# Altium PCB ExBoard.PcbDoc
Units mil, origin at the board's own origin, x right, y up, seen from the top; angles counter-clockwise.
Board outline 4548.82 x 3140.79 mil, 2 copper layers (Top Layer, Bottom Layer); 28 components, 43 nets, 168 pads, 0 vias.
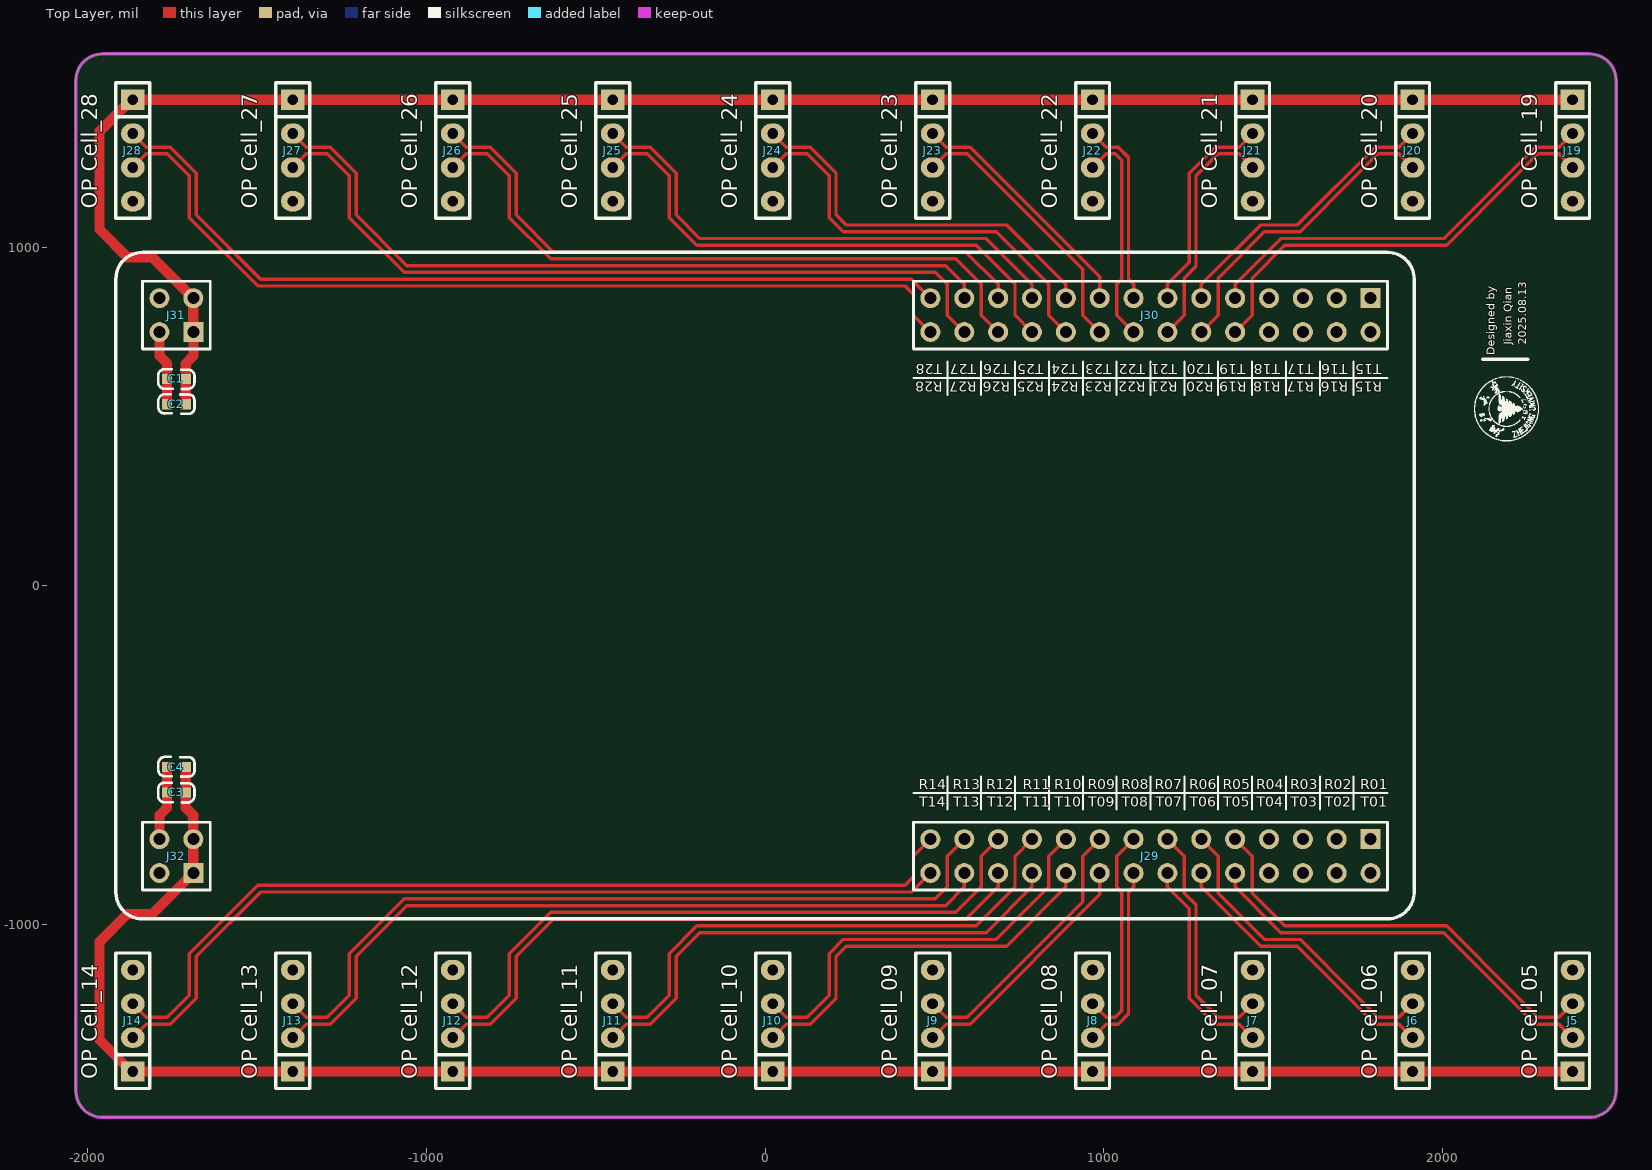
[diagram p0: Top Layer view]
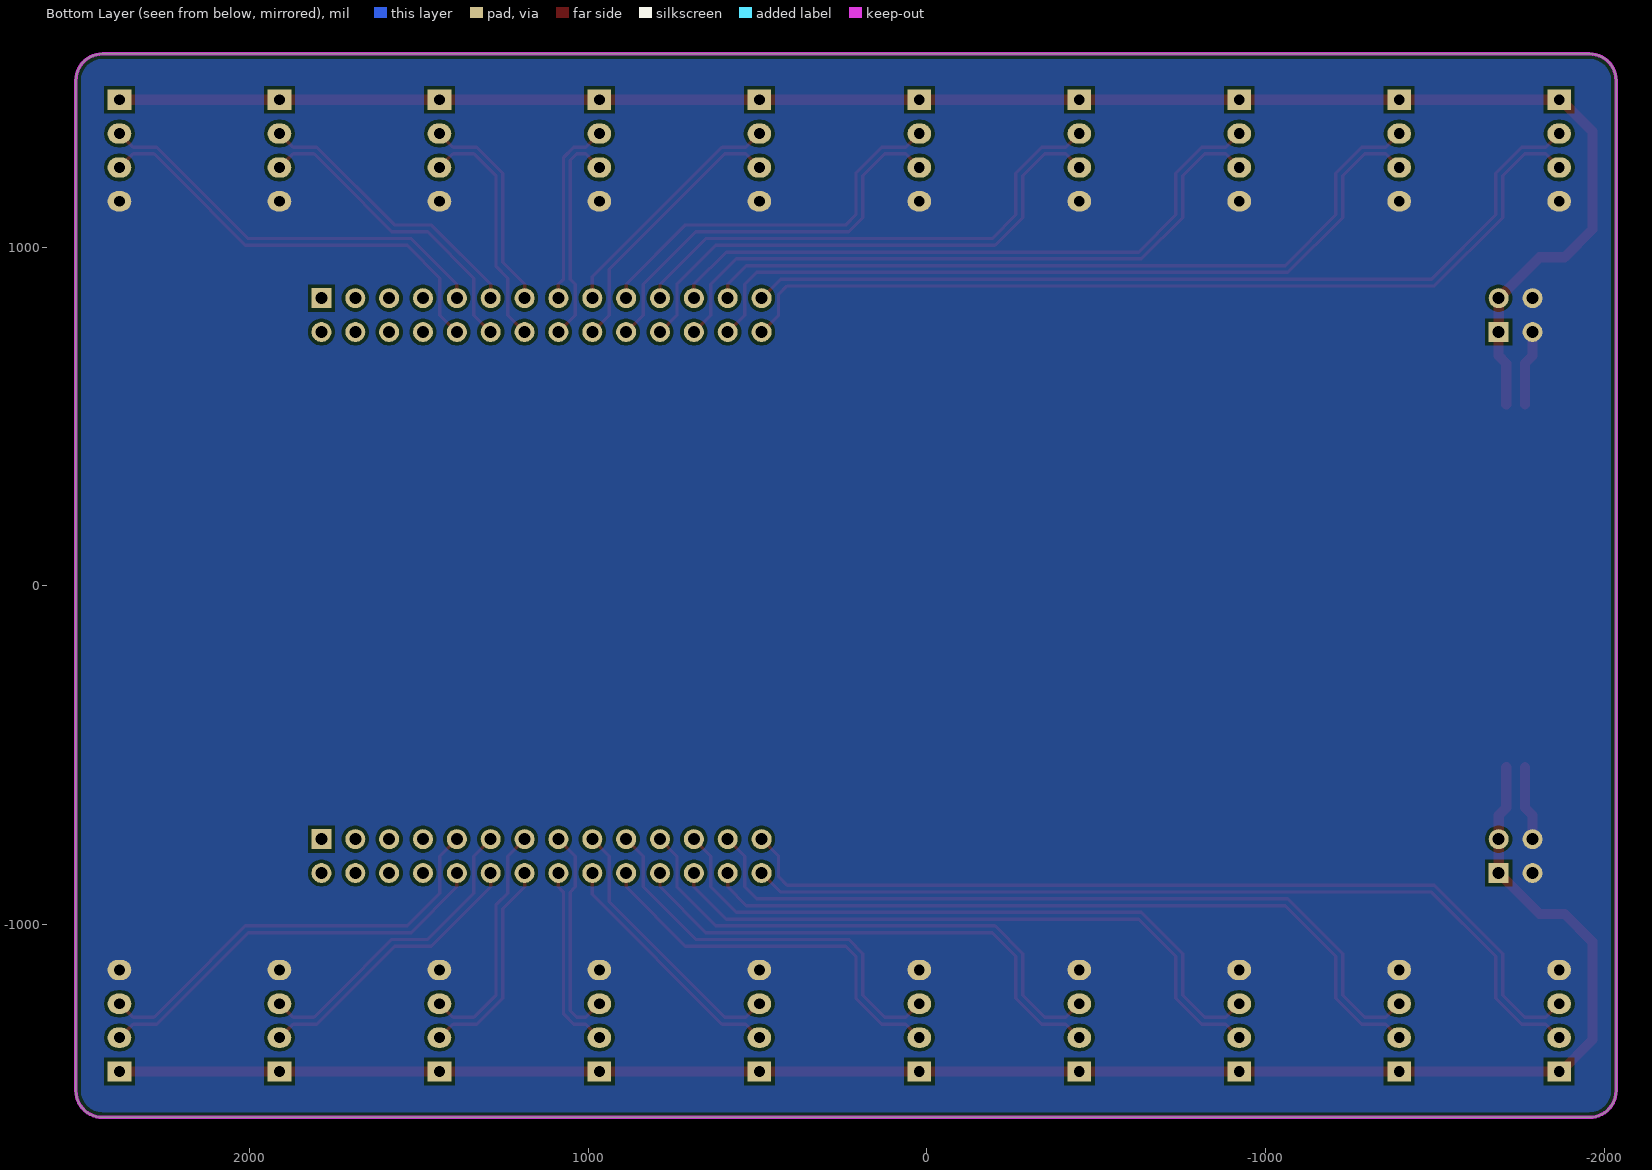
[diagram p1: Bottom Layer view, seen from below]
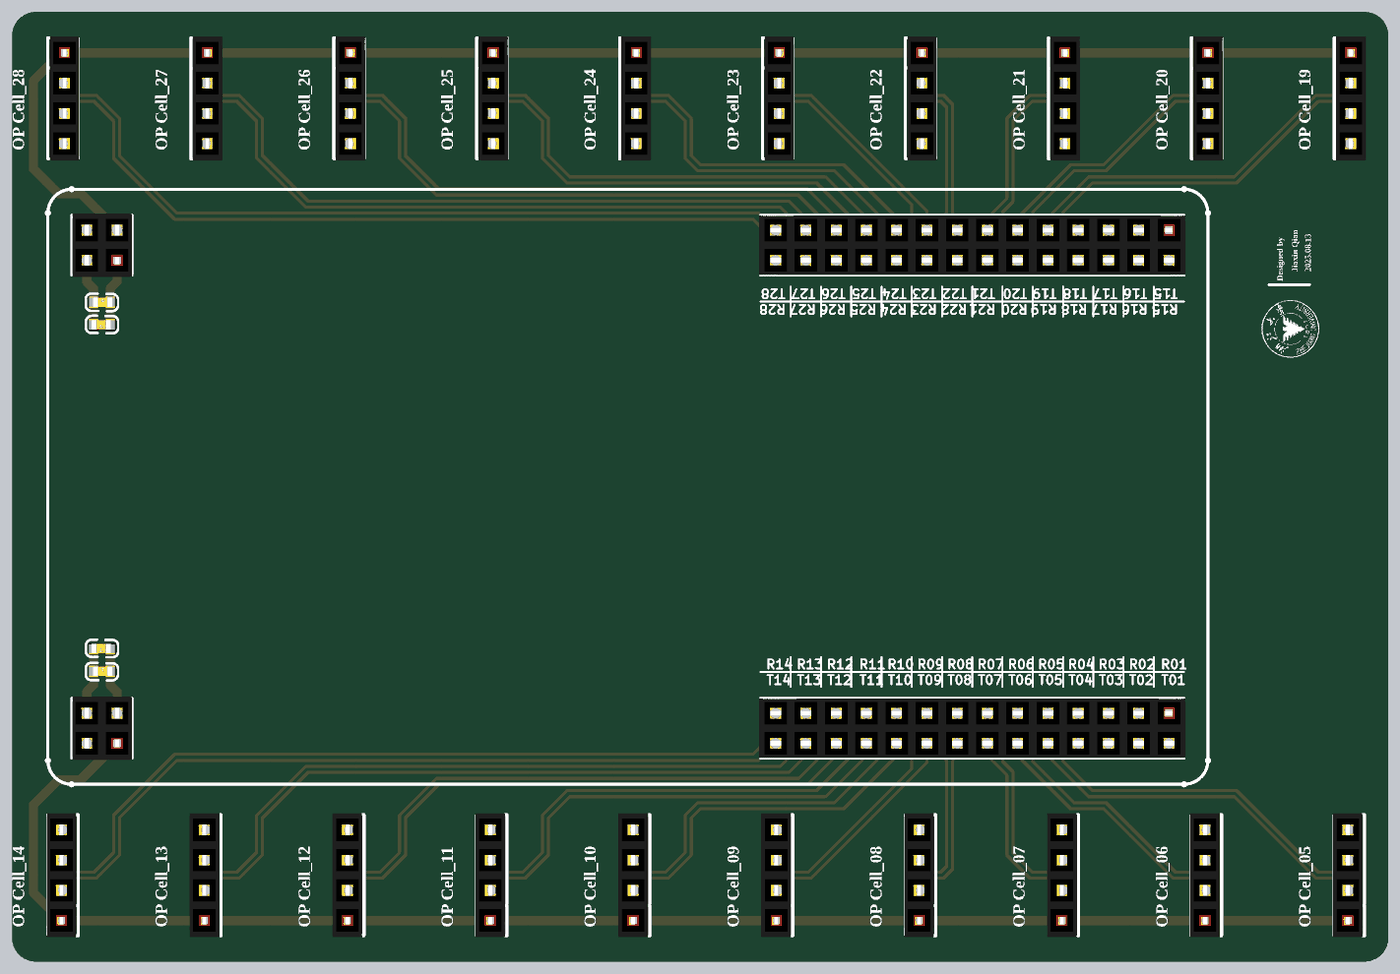
[diagram p2: 3D render of the assembled board from above, using the file's embedded part models]

## Layer stack, top to bottom
Top Solder: solder mask 0.4, Solder Resist, Dk 3.5
Top Layer: signal copper 1.4
Dielectric 1: dielectric 12.6, FR-4, Dk 4.8
Bottom Layer: signal copper 1.4
Bottom Solder: solder mask 0.4, Solder Resist, Dk 3.5

## Board outline
-2035.25,-1491.65 -2035.25,1491.65 cw(c-1956.51,1491.65) -1956.51,1570.39 2434.83,1570.39 cw(c2434.83,1491.65) 2513.57,1491.65 2513.57,-1491.65 cw(c2434.83,-1491.65) 2434.83,-1570.39 -1956.51,-1570.39 cw(c-1956.51,-1491.65)

## Design rules (kind name [scope] priority, off if disabled: settings)
Clearance [All] p1: gap=10 ignorepadtopadclearanceinfootprint=FALSE
PolygonConnect [All] p1: connectstyle=Direct reliefconductorwidth=10 reliefentries=4 polygonreliefangle="90 Angle" airgapwidth=10
RoutingVias [All] p1: holewidth=28 width=50 viastyle="Through Hole" minholewidth=28 minwidth=50 maxholewidth=28 maxwidth=50
SolderMaskExpansion [All] p1: expansion=4 istentingtop=FALSE
SupplyNets "Schematic Supply Nets_3" [InNet('VCC2')] p1: voltage=0.000
SupplyNets "Schematic Supply Nets_2" [InNet('VCC1')] p2: voltage=0.000
SupplyNets "Schematic Supply Nets_1" [InNet('GND')] p3: voltage=0.000
Width [All] p1: maxlimit=30 minlimit=10 preferedwidth=10
30 further rules are at their usual default settings.

## Components (designator, comment, footprint, x,y, rotation, side; value= is the part's Value field where it differs from the comment)
C1 "100nF/100V" 0603C -1766.08,610.98 r0 top
C2 "10uF/25V" 0603C -1710.72,535.28 r180 top
C3 "100nF/100V" 0603C -1766.14,-610.28 r0 top
C4 "10uF/25V" 0603C -1710.72,-536.05 r180 top
J5 "Female HDR1X4" Fe-HDR1X4/2.54-S 2384.83,-1435 r180 top
J6 "Female HDR1X4" Fe-HDR1X4/2.54-S 1912.39,-1435 r180 top
J7 "Female HDR1X4" Fe-HDR1X4/2.54-S 1439.95,-1435 r180 top
J8 "Female HDR1X4" Fe-HDR1X4/2.54-S 967.51,-1435 r180 top
J9 "Female HDR1X4" Fe-HDR1X4/2.54-S 495.07,-1435 r180 top
J10 "Female HDR1X4" Fe-HDR1X4/2.54-S 22.63,-1435 r180 top
J11 "Female HDR1X4" Fe-HDR1X4/2.54-S -449.82,-1435 r180 top
J12 "Female HDR1X4" Fe-HDR1X4/2.54-S -922.26,-1435 r180 top
J13 "Female HDR1X4" Fe-HDR1X4/2.54-S -1394.7,-1435 r180 top
J14 "Female HDR1X4" Fe-HDR1X4/2.54-S -1867.14,-1435 r180 top
J19 "Female HDR1X4" Fe-HDR1X4/2.54-S 2384.83,1435 r0 top
J20 "Female HDR1X4" Fe-HDR1X4/2.54-S 1912.39,1435 r0 top
J21 "Female HDR1X4" Fe-HDR1X4/2.54-S 1439.95,1435 r0 top
J22 "Female HDR1X4" Fe-HDR1X4/2.54-S 967.51,1435 r0 top
J23 "Female HDR1X4" Fe-HDR1X4/2.54-S 495.07,1435 r0 top
J24 "Female HDR1X4" Fe-HDR1X4/2.54-S 22.63,1435 r0 top
J25 "Female HDR1X4" Fe-HDR1X4/2.54-S -449.82,1435 r0 top
J26 "Female HDR1X4" Fe-HDR1X4/2.54-S -922.26,1435 r0 top
J27 "Female HDR1X4" Fe-HDR1X4/2.54-S -1394.7,1435 r0 top
J28 "Female HDR1X4" Fe-HDR1X4/2.54-S -1867.14,1435 r0 top
J29 "Female HDR2X14" Fe-HDR2X14/2.54-S 1788.41,-748.86 r180 top
J30 "Female HDR2X14" Fe-HDR2X14/2.54-S 1788.41,848.86 r180 top
J31 "Female HDR2X2" Fe-HDR2X2/2.54-S -1688.4,748.86 r90 top
J32 "Female HDR2X2" Fe-HDR2X2/2.54-S -1688.4,-848.86 r90 top

## Footprints (in the part's own frame and the unit in brackets; to place one, negate y for a bottom-side part, rotate by r counter-clockwise, add the part's x,y. Pads: shape width x height; smd on the part's side, far side on the other; paste and mask are expansions set on the pad)
0603C [mil]
  rect 30x30 smd: 1(0.21,-0.35) 2(55.21,-0.35)
  silkscreen extent -26,-30 81,28, body extent -1,-16 61,15, height 12
Fe-HDR1X4/2.54-S [mil]
  rect 70x60 hole 32: 1(0,0)
  oval 70x60 hole 32: 2(0,-100) 3(0,-200) 4(0,-300)
  silkscreen extent -50,-350 50,50, body extent -44,-355 54,55, height 335
Fe-HDR2X2/2.54-S [mm] "Connector; Header; 2x2 Position"
  rect 1.5x1.5 hole 0.9: 1(0,0)
  round 1.5 hole 0.9: 2(0,2.54) 3(2.54,0) 4(2.54,2.54)
  silkscreen extent -1.27,-1.27 3.81,3.81, body extent -1.39,-1.23 3.94,3.77, height 8.5
Fe-HDR2X14/2.54-S [mm] "Connector; Header; 14x2 Position"
  rect 1.5x1.5 hole 0.9: 1(0,0)
  round 1.5 hole 0.9: 2(0,2.54) 3(2.54,0) 4(2.54,2.54) 5(5.08,0) 6(5.08,2.54) 7(7.62,0) 8(7.62,2.54) 9(10.16,0) 10(10.16,2.54) 11(12.7,0) 12(12.7,2.54) 13(15.24,0) 14(15.24,2.54) 15(17.78,0) 16(17.78,2.54) 17(20.32,0) 18(20.32,2.54) 19(22.86,0) 20(22.86,2.54) 21(25.4,0) 22(25.4,2.54) 23(27.94,0) 24(27.94,2.54) 25(30.48,0) 26(30.48,2.54) 27(33.02,0) 28(33.02,2.54)
  silkscreen extent -1.27,-1.27 34.29,3.81, body extent -1.4,-1.23 34.41,3.77, height 8.5

## Part data
C1 C3: library part CAP, "CC0603KRX7R9BB104"
C2 C4: library part CAP, "CC0603MRX5R8BB106"

## Free pads (board coordinates)
  round 20 on Top Overlay: 1(-1917.14,-905.51) 1(-1917.14,-905.51) 1(-1917.14,905.51) 1(-1917.14,905.51) 1(-1838.4,-984.25) 1(-1838.4,-984.25) 1(-1838.4,984.25) 1(-1838.4,984.25) 1(1838.4,-984.25) 1(1838.4,-984.25) 1(1838.4,984.25) 1(1838.4,984.25) 1(1917.14,-905.51) 1(1917.14,-905.51) 1(1917.14,905.51) 1(1917.14,905.51)

## Nets (pads, with @x,y where several pads share a name; then routed paths per layer and width w, separated by ;. In a path a pad name is that pad's centre, name@x,y a point inside that pad or via, vN(x,y) a via of type N, cw(c..) or ccw(c..) an arc to the next point about the centre after c; other vN are vias at no path point)
GND: C1.1 C2.2 C3.1 C4.2 J5.4 J6.4 J7.4 J8.4 J9.4 J10.4 J11.4 J12.4 J13.4 J14.4 J19.4 J20.4 J21.4 J22.4 J23.4 J24.4 J25.4 J26.4 J27.4 J28.4 J31.2 J31.4 J32.2 J32.4 | length 445.2
  Top Layer w30: J32.4@-1788.46,-748.86 -1788.46,-678.4 -1765.93,-655.87 C3.1 C4.2 C4.2 ; J31.2 -1788.4,678.4 -1765.87,655.87 C1.1 -1765.93,610.57 C2.2
OP_RX5: J5.3 J29.9 | length 1295.1
  Top Layer w10: J29.9 1438.41,-798.86 1438.41,-908.41 1535,-1005 2012.69,-1005 2217.69,-1210 2282.69,-1275 2344.83,-1275 J5.3
OP_RX6: J6.3 J29.11 | length 922.7
  Top Layer w10: J29.11 1338.41,-798.86 1338.41,-908.41 1475,-1045 1580.25,-1045 1745.25,-1210 1810.25,-1275 1872.39,-1275 J6.3
OP_RX7: J7.3 J29.13 | length 706.7
  Top Layer w10: J29.13 1238.41,-798.86 1238.41,-908.41 1272.81,-942.81 1272.81,-1210 1337.81,-1275 1399.95,-1275 J7.3
OP_RX8: J8.3 J29.15 | length 644.4
  Top Layer w10: J8.3 1007.51,-1275 1034.43,-1275 1053.41,-1256.02 1053.41,-905 1038.41,-890 1038.41,-798.86 J29.15
OP_RX9: J9.3 J29.17 | length 806.9
  Top Layer w10: J9.3 535.07,-1275 597.2,-1275 938.41,-933.79 938.41,-798.86 J29.17
OP_RX10: J10.3 J29.19 | length 1225.9
  Top Layer w10: J10.3 62.63,-1275 124.76,-1275 189.76,-1210 189.76,-1086.72 231.48,-1045 683.41,-1045 838.41,-890 838.41,-798.86 J29.19
OP_RX11: J11.3 J29.21 | length 1598.3
  Top Layer w10: J11.3 -409.82,-1275 -347.68,-1275 -282.68,-1210 -282.68,-1086.72 -200.96,-1005 623.41,-1005 738.41,-890 738.41,-798.86 J29.21
OP_RX12: J12.3 J29.23 | length 1970.8
  Top Layer w10: J12.3 -882.26,-1275 -820.12,-1275 -755.12,-1210 -755.12,-1086.72 -633.4,-965 563.41,-965 638.41,-890 638.41,-798.86 J29.23
OP_RX13: J13.3 J29.25 | length 2343.2
  Top Layer w10: J13.3 -1354.7,-1275 -1292.56,-1275 -1227.56,-1210 -1227.56,-1086.72 -1065.84,-925 503.41,-925 538.41,-890 538.41,-798.86 J29.25
OP_RX14: J14.3 J29.27 | length 2698.1
  Top Layer w10: J14.3 -1827.14,-1275 -1765,-1275 -1700,-1210 -1700,-1086.72 -1498.28,-885 413.41,-885 438.41,-860 438.41,-798.86 J29.27
OP_RX19: J19.3 J30.10 | length 1295.1
  Top Layer w10: J30.10 1438.41,798.86 1438.41,908.42 1535,1005 2012.69,1005 2217.69,1210 2282.69,1275 2344.83,1275 J19.3@2384.83,1235
OP_RX20: J20.3 J30.12 | length 922.7
  Top Layer w10: J30.12 1338.41,798.86 1338.41,908.42 1475,1045 1580.25,1045 1745.25,1210 1810.25,1275 1872.39,1275 J20.3@1912.39,1235
OP_RX21: J21.3 J30.14 | length 706.7
  Top Layer w10: J30.14 1238.41,798.86 1238.41,908.42 1272.81,942.81 1272.81,1210 1337.81,1275 1399.95,1275 J21.3@1439.95,1235
OP_RX22: J22.3 J30.16 | length 644.4
  Top Layer w10: J22.3@967.51,1235 1007.51,1275 1034.43,1275 1053.41,1256.02 1053.41,905 1038.41,890 1038.41,798.86 J30.16
OP_RX23: J23.3 J30.18 | length 806.9
  Top Layer w10: J23.3@495.07,1235 535.07,1275 597.2,1275 938.41,933.79 938.41,798.86 J30.18
OP_RX24: J24.3 J30.20 | length 1225.9
  Top Layer w10: J24.3@22.63,1235 62.63,1275 124.76,1275 189.76,1210 189.76,1086.72 231.48,1045 683.41,1045 838.41,890 838.41,798.86 J30.20
OP_RX25: J25.3 J30.22 | length 1598.3
  Top Layer w10: J25.3@-449.82,1235 -409.82,1275 -347.68,1275 -282.68,1210 -282.68,1086.72 -200.96,1005 623.41,1005 738.41,890 738.41,798.86 J30.22
OP_RX26: J26.3 J30.24 | length 1970.8
  Top Layer w10: J26.3@-922.26,1235 -882.26,1275 -820.12,1275 -755.12,1210 -755.12,1086.72 -633.4,965 563.41,965 638.41,890 638.41,798.86 J30.24
OP_RX27: J27.3 J30.26 | length 2343.2
  Top Layer w10: J27.3@-1394.7,1235 -1354.7,1275 -1292.56,1275 -1227.56,1210 -1227.56,1086.72 -1065.84,925 503.41,925 538.41,890 538.41,798.86 J30.26
OP_RX28: J28.3 J30.28 | length 2698.1
  Top Layer w10: J28.3@-1867.14,1235 -1827.14,1275 -1765,1275 -1700,1210 -1700,1086.72 -1498.28,885 413.41,885 438.41,860 438.41,798.86 J30.28
OP_TX5: J5.2 J29.10 | length 1221.9
  Top Layer w10: J29.10 1388.41,-890 1523.41,-1025 2004.41,-1025 2274.41,-1295 2344.83,-1295 J5.2
OP_TX6: J6.2 J29.12 | length 849.4
  Top Layer w10: J29.12 1288.41,-890 1463.41,-1065 1571.97,-1065 1801.97,-1295 1872.39,-1295 J6.2
OP_TX7: J7.2 J29.14 | length 631.6
  Top Layer w10: J29.14 1188.41,-890 1252.81,-954.4 1252.81,-1218.28 1329.53,-1295 1399.95,-1295 J7.2
OP_TX8: J8.2 J29.16 | length 556.9
  Top Layer w10: J8.2 1007.51,-1295 1042.72,-1295 1073.41,-1264.31 1073.41,-905 1088.41,-890 J29.16
OP_TX9: J9.2 J29.18 | length 731.7
  Top Layer w10: J9.2 535.07,-1295 605.49,-1295 988.41,-912.08 J29.18
OP_TX10: J10.2 J29.20 | length 1163.5
  Top Layer w10: J10.2 62.63,-1295 133.05,-1295 209.76,-1218.28 209.76,-1095 239.76,-1065 713.41,-1065 888.41,-890 J29.20
OP_TX11: J11.2 J29.22 | length 1535.9
  Top Layer w10: J11.2 -409.82,-1295 -339.39,-1295 -262.68,-1218.28 -262.68,-1095 -192.68,-1025 653.41,-1025 788.41,-890 J29.22
OP_TX12: J12.2 J29.24 | length 1908.4
  Top Layer w10: J12.2 -882.26,-1295 -811.83,-1295 -735.12,-1218.28 -735.12,-1095 -625.12,-985 593.41,-985 688.41,-890 J29.24
OP_TX13: J13.2 J29.26 | length 2280.8
  Top Layer w10: J13.2 -1354.7,-1295 -1284.27,-1295 -1207.56,-1218.28 -1207.56,-1095 -1057.56,-945 533.41,-945 588.41,-890 J29.26
OP_TX14: J14.2 J29.28 | length 2629.1
  Top Layer w10: J14.2 -1827.14,-1295 -1756.72,-1295 -1680,-1218.28 -1680,-1095 -1490,-905 432.27,-905 J29.28
OP_TX19: J19.2 J30.9 | length 1221.9
  Top Layer w10: J30.9 1388.41,890 1523.41,1025 2004.41,1025 2274.41,1295 2344.83,1295 J19.2@2384.83,1335
OP_TX20: J20.2 J30.11 | length 849.4
  Top Layer w10: J30.11 1288.41,890 1463.41,1065 1571.97,1065 1801.97,1295 1872.39,1295 J20.2@1912.39,1335
OP_TX21: J21.2 J30.13 | length 631.6
  Top Layer w10: J30.13 1188.41,890 1252.81,954.4 1252.81,1218.29 1329.53,1295 1399.95,1295 J21.2@1439.95,1335
OP_TX22: J22.2 J30.15 | length 556.9
  Top Layer w10: J22.2@967.51,1335 1007.51,1295 1042.72,1295 1073.41,1264.31 1073.41,905 1088.41,890 J30.15
OP_TX23: J23.2 J30.17 | length 731.7
  Top Layer w10: J23.2@495.07,1335 535.07,1295 605.49,1295 988.41,912.08 J30.17
OP_TX24: J24.2 J30.19 | length 1163.5
  Top Layer w10: J24.2@22.63,1335 62.63,1295 133.05,1295 209.76,1218.29 209.76,1095 239.76,1065 713.41,1065 888.41,890 J30.19
OP_TX25: J25.2 J30.21 | length 1535.9
  Top Layer w10: J25.2@-449.82,1335 -409.82,1295 -339.39,1295 -262.68,1218.29 -262.68,1095 -192.68,1025 653.41,1025 788.41,890 J30.21
OP_TX26: J26.2 J30.23 | length 1908.4
  Top Layer w10: J26.2@-922.26,1335 -882.26,1295 -811.83,1295 -735.12,1218.29 -735.12,1095 -625.12,985 593.41,985 688.41,890 J30.23
OP_TX27: J27.2 J30.25 | length 2280.8
  Top Layer w10: J27.2@-1394.7,1335 -1354.7,1295 -1284.27,1295 -1207.56,1218.29 -1207.56,1095 -1057.56,945 533.41,945 588.41,890 J30.25
OP_TX28: J28.2 J30.27 | length 2629.1
  Top Layer w10: J28.2@-1867.14,1335 -1827.14,1295 -1756.72,1295 -1680,1218.29 -1680,1095 -1490,905 432.27,905 J30.27
VCC1: C1.2 C2.1 J19.1 J20.1 J21.1 J22.1 J23.1 J24.1 J25.1 J26.1 J27.1 J28.1 J31.1 J31.3 | length 5361.9
  Top Layer w30: C2.1 C2.1 C1.2 -1710.87,655.87 -1688.33,678.4 J31.1@-1688.33,748.86 ; J31.1 J31.3 -1809.54,970 -1883.28,970 -1965,1051.72 -1965,1342.14 -1872.14,1435 J28.1 J27.1 J26.1 J25.1 J24.1 J23.1 J22.1 J21.1 J20.1 J19.1
VCC2: C3.2 C4.1 J5.1 J6.1 J7.1 J8.1 J9.1 J10.1 J11.1 J12.1 J13.1 J14.1 J32.1 J32.3 | length 9613.9
  Top Layer w30: J14.1 J5.1 ; C4.1@-1710.99,-535.63 C4.1 C3.2 -1710.93,-655.87 -1688.4,-678.4 J32.3 ; J32.3@-1688.46,-748.86 -1688.46,-848.86 -1809.6,-970 -1883.35,-970 -1965.06,-1051.72 -1965.06,-1342.14 -1872.2,-1435 -1867.2,-1435 -1394.76,-1435 J12.1 -449.88,-1435 J10.1 495,-1435 967.44,-1435 1439.88,-1435 1912.33,-1435 J5.1
pads on no net: J29.1 J29.2 J29.3 J29.4 J29.5 J29.6 J29.7 J29.8 J30.1 J30.2 J30.3 J30.4 J30.5 J30.6 J30.7 J30.8

## Polygon pours and split planes (outlines as drawn)
GND on Bottom Layer (solid, remove dead copper, pour order 0): -2035.25,-1491.65 -2035.25,1491.65 cw(c-1956.51,1491.65) -1956.51,1570.39 2434.83,1570.39 cw(c2434.83,1491.65) 2513.57,1491.65 2513.57,-1491.65 cw(c2434.83,-1491.65) 2434.83,-1570.39 -1956.51,-1570.39 cw(c-1956.51,-1491.65)

## Keep-outs
Keep-Out Layer:
  the board outline again, w10

## Silkscreen, mask and mechanical layers (free items; w line width, h text height)
Top Overlay:
  drawing of 80 lines, arcs and shapes, not listed
  text "OP Cell_21" at 1351.49,1112.89 h80 r90
  text "OP Cell_28" at -1955.59,1112.51 h80 r90
  text "OP Cell_27" at -1483.15,1112.4 h80 r90
  text "OP Cell_26" at -1010.71,1112.46 h80 r90
  text "OP Cell_25" at -538.27,1112.53 h80 r90
  text "OP Cell_24" at -65.83,1112.56 h80 r90
  text "OP Cell_23" at 406.61,1112.71 h80 r90
  text "OP Cell_22" at 879.05,1112.63 h80 r90
  text "OP Cell_20" at 1823.93,1112.53 h80 r90
  text "OP Cell_19" at 2296.37,1112.53 h80 r90
  text "Jiaxin Qian" at 2213.75,711.06 h40 r90
  text "2025.08.13" at 2256.87,711.06 h40 r90
  text "Designed by" at 2164.61,680.37 h40 r90
  text "T28" at 523.55,653.63 h30 r180
  text "T27" at 623.55,653.63 h30 r180
  text "T26" at 722.83,653.63 h30 r180
  text "T25" at 823.55,653.63 h30 r180
  text "T24" at 924.26,653.63 h30 r180
  text "T23" at 1023.55,653.63 h30 r180
  text "T22" at 1123.55,653.63 h30 r180
  text "T21" at 1217.12,653.63 h30 r180
  text "T20" at 1323.55,653.63 h30 r180
  text "T19" at 1420.48,653.63 h30 r180
  text "T18" at 1521.19,653.63 h30 r180
  text "T17" at 1621.19,653.63 h30 r180
  text "T16" at 1720.48,653.63 h30 r180
  text "T15" at 1821.19,653.63 h30 r180
  text "R28" at 525.12,601.63 h30 r180
  text "R27" at 625.12,601.63 h30 r180
  text "R26" at 724.41,601.63 h30 r180
  text "R25" at 825.12,601.63 h30 r180
  text "R24" at 925.83,601.63 h30 r180
  text "R23" at 1025.12,601.63 h30 r180
  text "R22" at 1125.12,601.63 h30 r180
  text "R21" at 1218.69,601.63 h30 r180
  text "R20" at 1325.12,601.63 h30 r180
  text "R19" at 1422.05,601.63 h30 r180
  text "R18" at 1522.76,601.63 h30 r180
  text "R17" at 1622.76,601.63 h30 r180
  text "R16" at 1722.05,601.63 h30 r180
  text "R15" at 1822.76,601.63 h30 r180
  text "R14" at 453.35,-601.63 h30
  text "R13" at 554.06,-601.63 h30
  text "R12" at 654.06,-601.63 h30
  text "R11" at 760.49,-601.63 h30
  text "R10" at 854.06,-601.63 h30
  text "R09" at 952.42,-601.63 h30
  text "R08" at 1051.71,-601.63 h30
  text "R07" at 1151.71,-601.63 h30
  text "R06" at 1252.42,-601.63 h30
  text "R05" at 1351.71,-601.63 h30
  text "R04" at 1450.99,-601.63 h30
  text "R03" at 1551.71,-601.63 h30
  text "R02" at 1651.71,-601.63 h30
  text "R01" at 1758.13,-601.63 h30
  text "T14" at 454.92,-653.63 h30
  text "T13" at 555.63,-653.63 h30
  text "T12" at 655.63,-653.63 h30
  text "T11" at 762.06,-653.63 h30
  text "T10" at 855.63,-653.63 h30
  text "T09" at 953.99,-653.63 h30
  text "T08" at 1053.28,-653.63 h30
  text "T07" at 1153.28,-653.63 h30
  text "T06" at 1253.99,-653.63 h30
  text "T05" at 1353.28,-653.63 h30
  text "T04" at 1452.56,-653.63 h30
  text "T03" at 1553.28,-653.63 h30
  text "T02" at 1653.28,-653.63 h30
  text "T01" at 1759.7,-653.63 h30
  text "OP Cell_11" at -538.27,-1457.11 h80 r90
  text "OP Cell_14" at -1955.6,-1457.44 h80 r90
  text "OP Cell_13" at -1483.15,-1457.29 h80 r90
  text "OP Cell_12" at -1010.71,-1457.37 h80 r90
  text "OP Cell_10" at -65.83,-1457.47 h80 r90
  text "OP Cell_09" at 406.61,-1457.47 h80 r90
  text "OP Cell_08" at 879.05,-1457.49 h80 r90
  text "OP Cell_07" at 1351.49,-1457.6 h80 r90
  text "OP Cell_06" at 1823.93,-1457.54 h80 r90
  text "OP Cell_05" at 2296.37,-1457.47 h80 r90
Mechanical 1:
  the board outline again, w50